# EAGLE board Airgap.job (EAGLE 6.3)
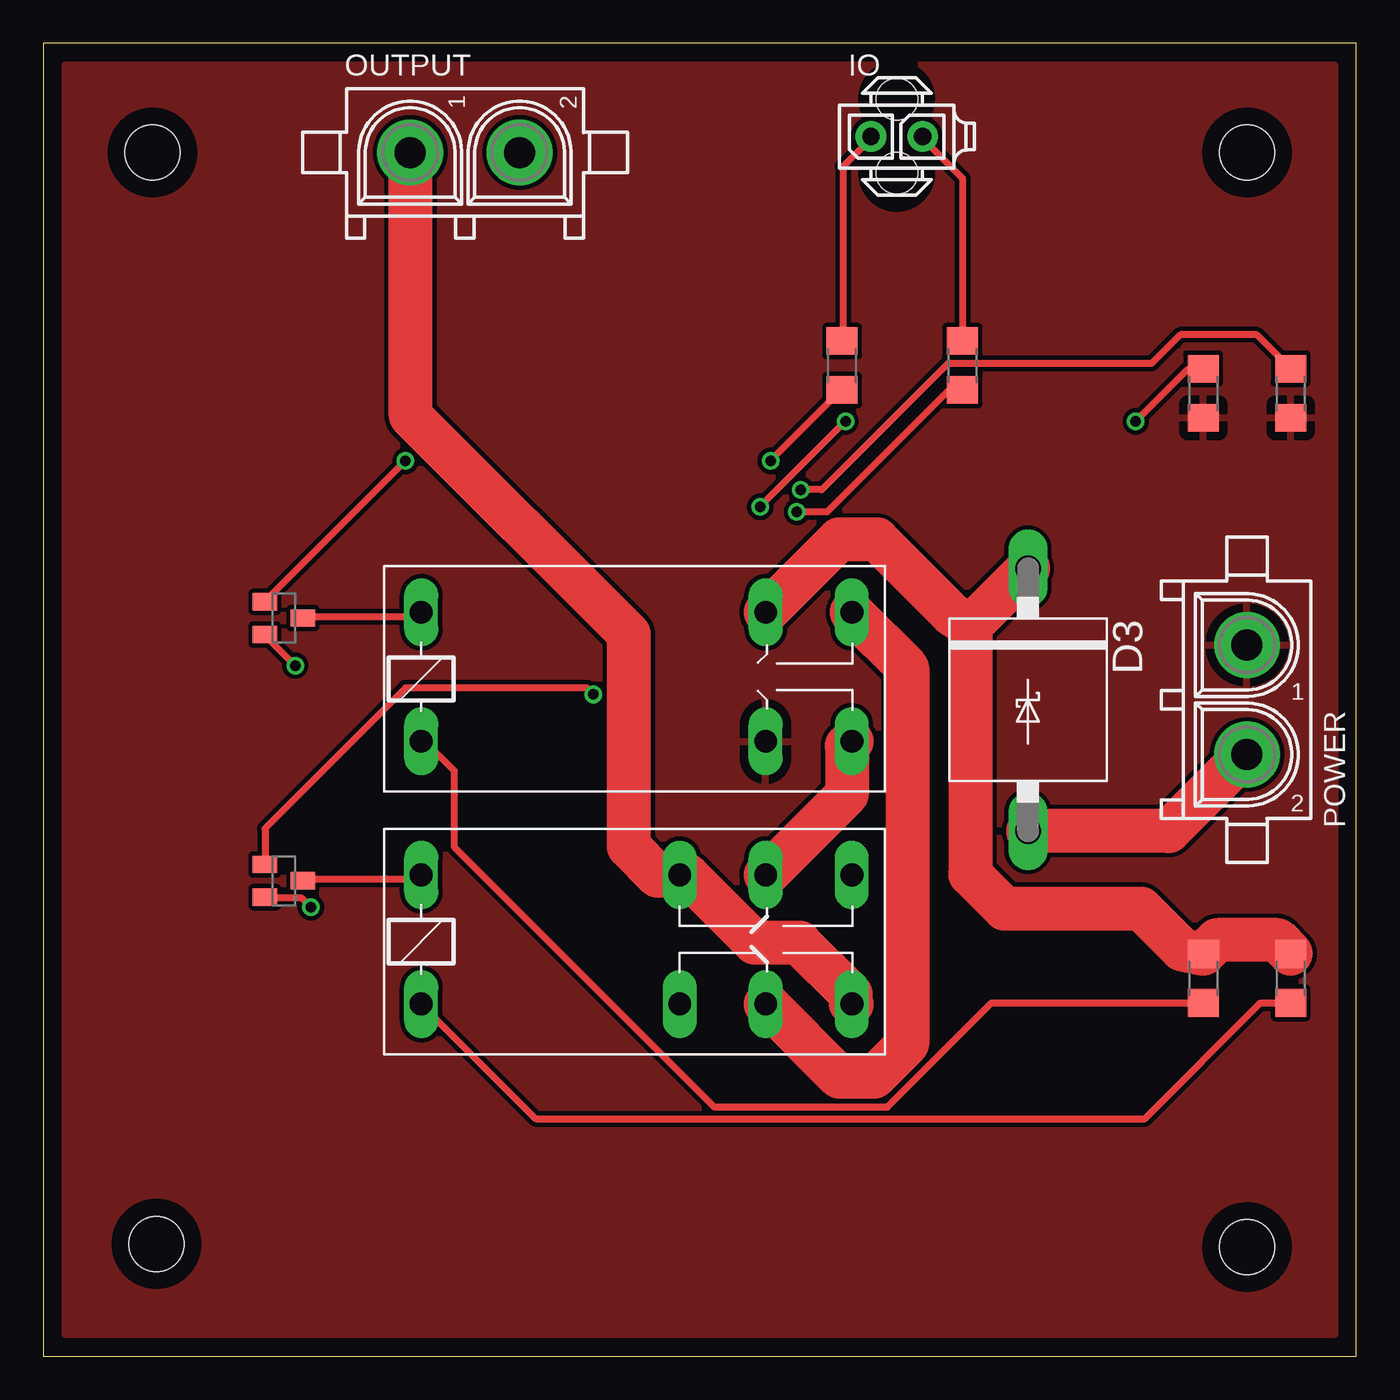
[diagram p0: board, top side]
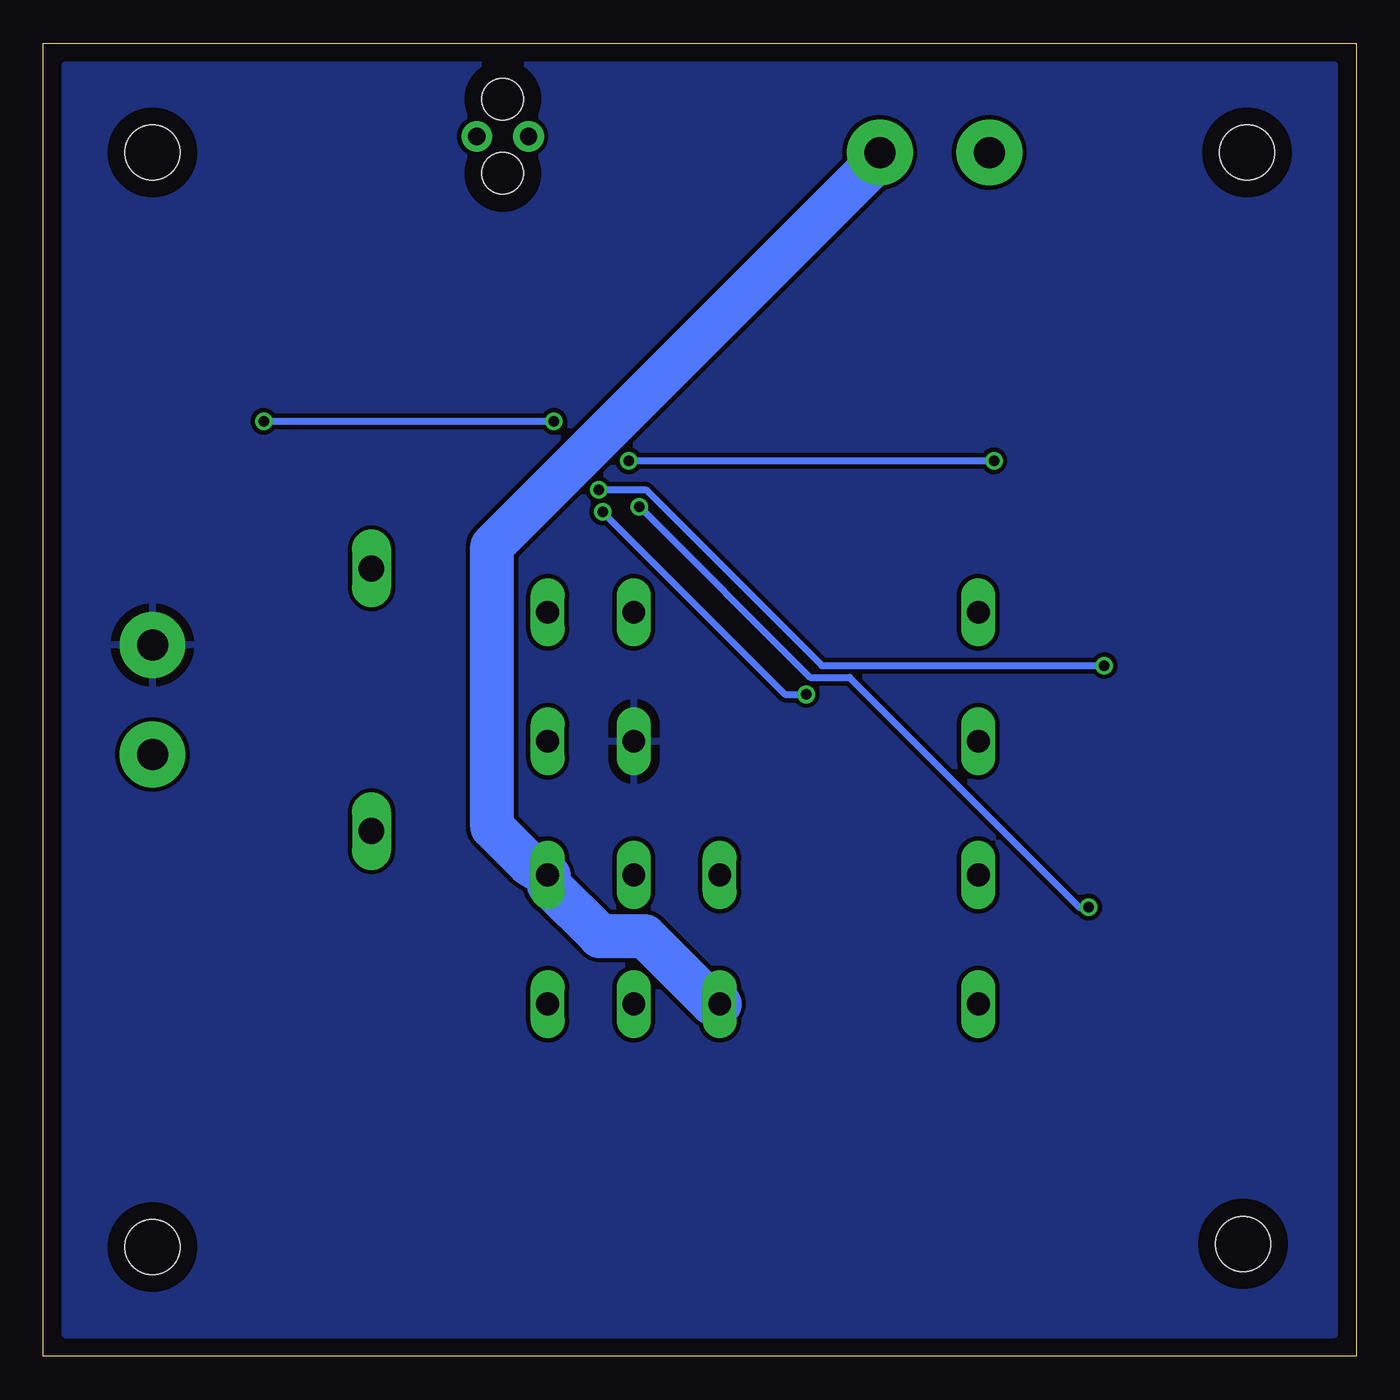
[diagram p1: board, bottom side, seen from below]

Size 76.2 x 76.2 mm. Coordinates in mm from the lower left corner, seen from the top.
Outline: 0,0 76.2,0 76.2,76.2 0,76.2 0,0
Copper layers (1*16): Top 0.035mm / dielectric 1.5mm / Bottom 0.035mm
Design rules "SJ Design Rules": minimum track width 16mil, minimum drill 24mil, track to track 10mil, track to pad 10mil, pad to pad 10mil, via to via 10mil, smd to smd 10mil, copper to edge 40mil, drill to drill 10mil, minimum pad ring 10mil, minimum via ring 8mil, stop-mask expansion 4mil, vias tented up to drill 0mil, thermal gap 20mil
Net classes: 1 power: width 2.54 mm, drill 76.2 mm
Holes 3.17 mm at 6.58,6.53 69.85,69.85 69.85,6.35 6.35,69.85

## Footprints (pad centres in the part's own frame; a part is rotated, then mirrored left to right if it is on the bottom)
P6T15 = drill 1.499 long: A 7.62,0; C -7.62,0
794681-2 = drill 1 pad 1.778: 1 0,-1.5; 2 0,1.5 | hole 2.4: 2.13,0; -2.17,0
G2R2 = drill 1.321 long: 1 -2.54,-3.683; 2 -2.54,3.81; O1 12.471,3.81; O2 12.471,-3.683; P1 17.45,3.81; P2 17.45,-3.683; S1 22.454,3.81; S2 22.454,-3.683
G2R2A = drill 1.321 long: 1 -2.54,-3.683; 2 -2.54,3.81; P1 17.45,3.81; P2 17.45,-3.683; S1 22.454,3.81; S2 22.454,-3.683
350428-1 = drill 1.8 pad 3.81: 1 -3.175,0; 2 3.175,0
R1206 = smd 1.6 x 1.803: 1 -1.422,0; 2 1.422,0
SOT23 = smd 1 x 1.4: 1 -0.95,-1.1; 2 0.95,-1.1; 3 0,1.1

## Placement (x,y rotation side)
D3  6A4  [P6T15]  57.15,38.1 270 top
IO  794681-2  [794681-2]  49.53,70.78 270 top
K1  G2R2  [G2R2]  24.47,24.13 0 top
K2  G2R2A  [G2R2A]  24.47,39.37 0 top
OUTPUT  350428-1  [350428-1]  24.47,69.85 0 top
POWER  350428-1  [350428-1]  69.85,38.1 270 top
R1  100  [R1206]  72.39,21.93 90 top
R2  100  [R1206]  67.31,21.93 90 top
R3  1k  [R1206]  53.34,57.49 90 top
R4  1k  [R1206]  46.35,57.49 90 top
R5  0  [R1206]  67.31,55.88 90 top
R6  0  [R1206]  72.39,55.88 90 top
T1  PMV56XN  [SOT23]  13.97,27.6 270 top
T2  PMV56XN  [SOT23]  13.97,42.84 270 top

## Library data of the parts
D3 = diode
IO = con-amp; DIR: DIR; ON: ON
K1 = relay; MF: OMRON COMPONENTS USA; MPN: G2R-2-DC6; OC_FARNELL: unknown; OC_NEWARK: 89C5317
K2 = relay; MPN: G2R-2A-DC24; OC_FARNELL: 6985269; OC_NEWARK: 36M5257
OUTPUT = con-amp; NEG: -; POS: +
POWER = con-amp; NEG: -; POS: +; VOLTAGE: 12V
R1-R4 = SolarJacketsADC; PART_NUM: CR1206-FX-1001GLF
R5 R6 = SolarJacketsADC; PART_NUM: CR1206-J/-000ELF
T1 T2 = SolarJacketsADC; PART_NUM: PMV56XN,215

## Nets
12V [power]: D3.C K2.P1 R1.2 R2.2
12V_PRE [power]: D3.A POWER.2
DIR: IO.2 R3.2
GND [power]: K2.P2 POWER.1 R5.1 R6.1
MOTOR+ [power]: K1.O2 K1.S1 OUTPUT.2
MOTOR- [power]: K1.O1 K1.S2 OUTPUT.1
N$1 [power]: K1.P2 K2.S1
N$2 [power]: K1.P1 K2.S2
N$3: K1.1 R1.1
N$4: K2.1 R2.1
N$5: K1.2 T1.3
N$6: K2.2 T2.3
N$7: R4.1 T2.1
N$8: R3.1 T1.1
N$9: R5.2 T1.2
N$10: R6.2 T2.2
ON: IO.1 R4.2

## Tracks (layer width: path | path; a pad name or v marks a point on that pad's centre or on a via)
12V
  Top 2.54: R1.2 72.39,23.39 71.63,24.16 68.12,24.16 67.36,23.39 R2.2 66.06,23.62 63.7,25.98 55.78,25.98 53.8,27.96 53.8,42.37 | D3.C 53.8,42.37 | K2.P1 41.99,43.2 46.18,47.4 48.39,47.4 52.73,43.05 53.8,42.37
12V_PRE
  Top 2.54: D3.A 65.3,30.48 69.8,34.98 POWER.2
DIR
  Top 0.406: R3.2 53.34,68.35 50.98,70.71 IO.2
GND
  pour Top: 1.27,74.93 74.93,74.93 74.93,1.27 1.27,1.27
  pour Bottom: 1.27,74.93 74.93,74.93 74.93,1.27 1.27,1.27
MOTOR+
  Bottom 2.54: K1.O2 36.96,20.5 37.41,20.5 41.3,24.38 43.89,24.38 46.86,27.36 46.86,27.89 K1.S1 48.01,28.57 50.14,30.71 50.14,47.02 27.66,69.49 27.66,69.8 OUTPUT.2
MOTOR-
  Top 2.54: K1.S2 46.86,20.5 46.86,21.03 43.89,24 41.3,24 37.41,27.89 36.96,27.89 K1.O1 35.66,27.89 33.98,29.57 33.98,41.91 21.34,54.56 21.34,69.8 OUTPUT.1
N$1
  Top 2.54: K1.P2 41.99,20.42 46.18,16.23 48.23,16.23 50.14,18.14 50.14,39.93 46.94,43.13 K2.S1
N$2
  Top 2.54: K1.P1 41.99,27.96 46.63,32.61 46.63,35.43 46.86,35.66 K2.S2
N$3
  Top 0.406: R1.1 72.39,20.5 70.64,20.5 63.93,13.79 28.57,13.79 21.95,20.42 K1.1
N$4
  Top 0.406: R2.1 67.28,20.5 55.02,20.5 49,14.48 38.94,14.48 23.85,29.57 23.85,33.98 22.17,35.66 21.95,35.66 K2.1
N$5
  Top 0.406: T1.3 15.09,27.66 21.64,27.66 21.87,27.89 K1.2
N$6
  Top 0.406: T2.3 15.09,42.9 21.64,42.9 21.87,43.13 K2.2
N$7  (via drill 0.61)
  Top 0.406: v21.03,51.97 12.88,43.81 T2.1 | v42.22,51.97 46.33,56.08 R4.1
  Bottom 0.406: v42.22,51.97 v21.03,51.97
N$8  (via drill 0.61)
  Top 0.406: v31.93,38.41 31.55,38.79 21.03,38.79 12.88,30.63 12.88,28.57 T1.1 | v43.74,49 45.49,49 52.5,56.01 53.34,56.01 R3.1
  Bottom 0.406: v31.93,38.41 33.15,38.41 v43.74,49
N$9  (via drill 0.61)
  Top 0.406: v15.54,26.06 15.01,26.59 12.88,26.59 T1.2 | v46.56,54.25 v41.6,49.3 | v63.4,54.25 66.37,57.23 67.28,57.23 R5.2
  Bottom 0.406: v15.54,26.06 16.08,26.06 29.41,39.4 31.7,39.4 v41.6,49.3 | v63.4,54.25 v46.56,54.25
N$10  (via drill 0.61)
  Top 0.406: v14.63,40.08 12.88,41.83 T2.2 | v43.97,50.29 45.19,50.29 52.5,57.61 64.31,57.61 65.99,59.28 70.41,59.28 R6.2 | R6.2
  Bottom 0.406: v14.63,40.08 31.01,40.08 41.22,50.29 v43.97,50.29
ON
  Top 0.406: R4.2 46.41,58.98 46.41,69.04 48.08,70.71 IO.1

## Text on the board
tValues: SOLAR JACKETS AIR GAP BOARD / 1/6/13 REV 3